# Altium PCB SFCmasterL.PcbDoc
Units mm, origin at the board's own origin, x right, y up, seen from the top; angles counter-clockwise.
Board outline 152.4 x 101.6 mm, 2 copper layers (Top Layer, Bottom Layer); 29 components, 16 nets, 98 pads, 31 vias.
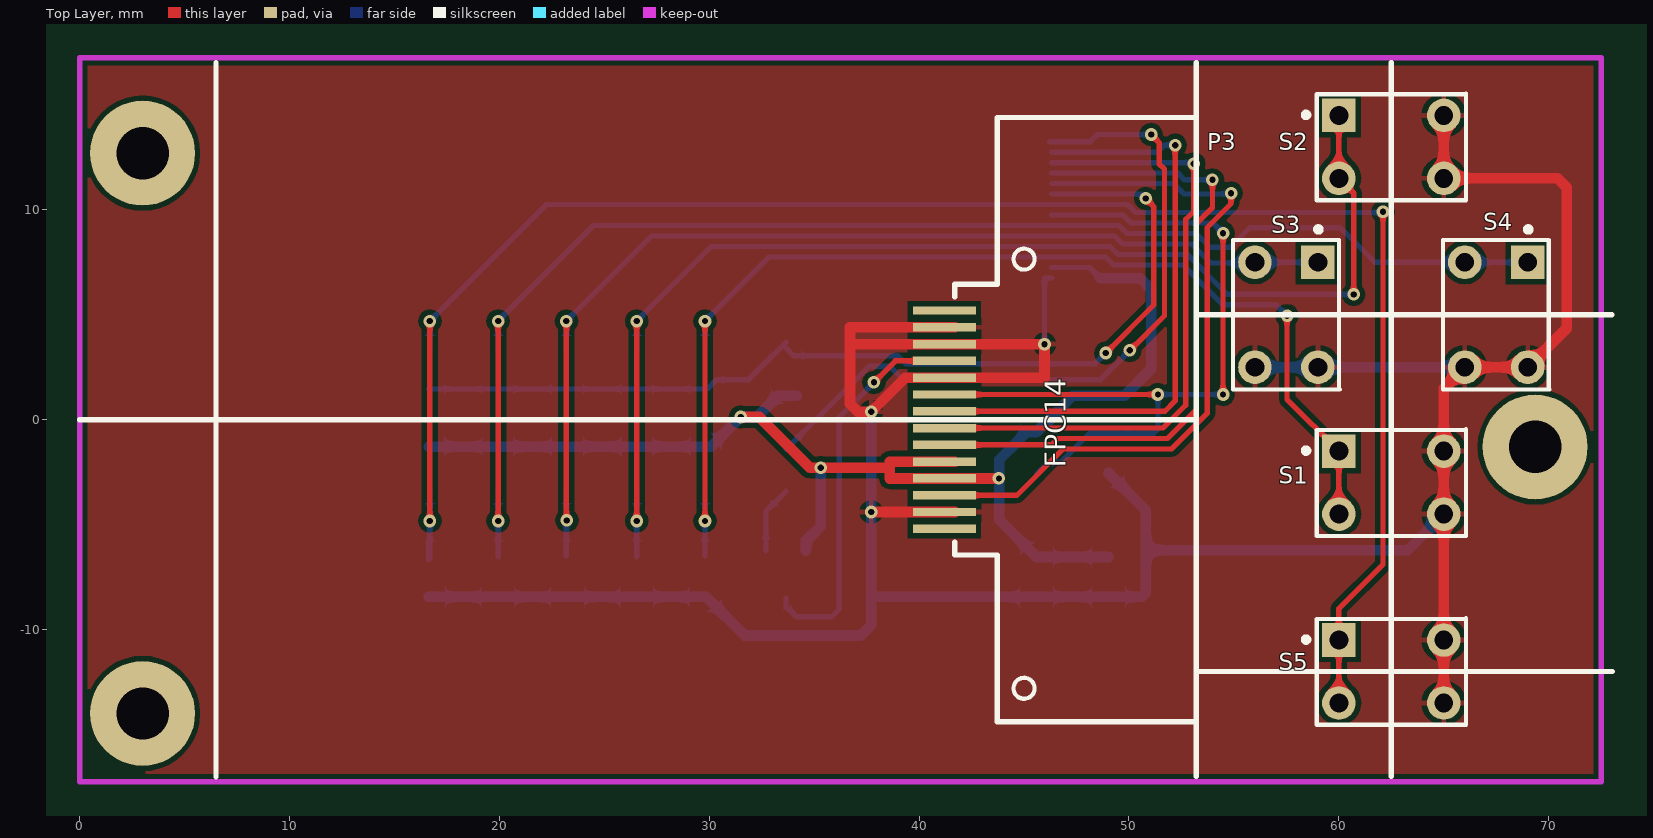
[diagram p0: Top Layer view]
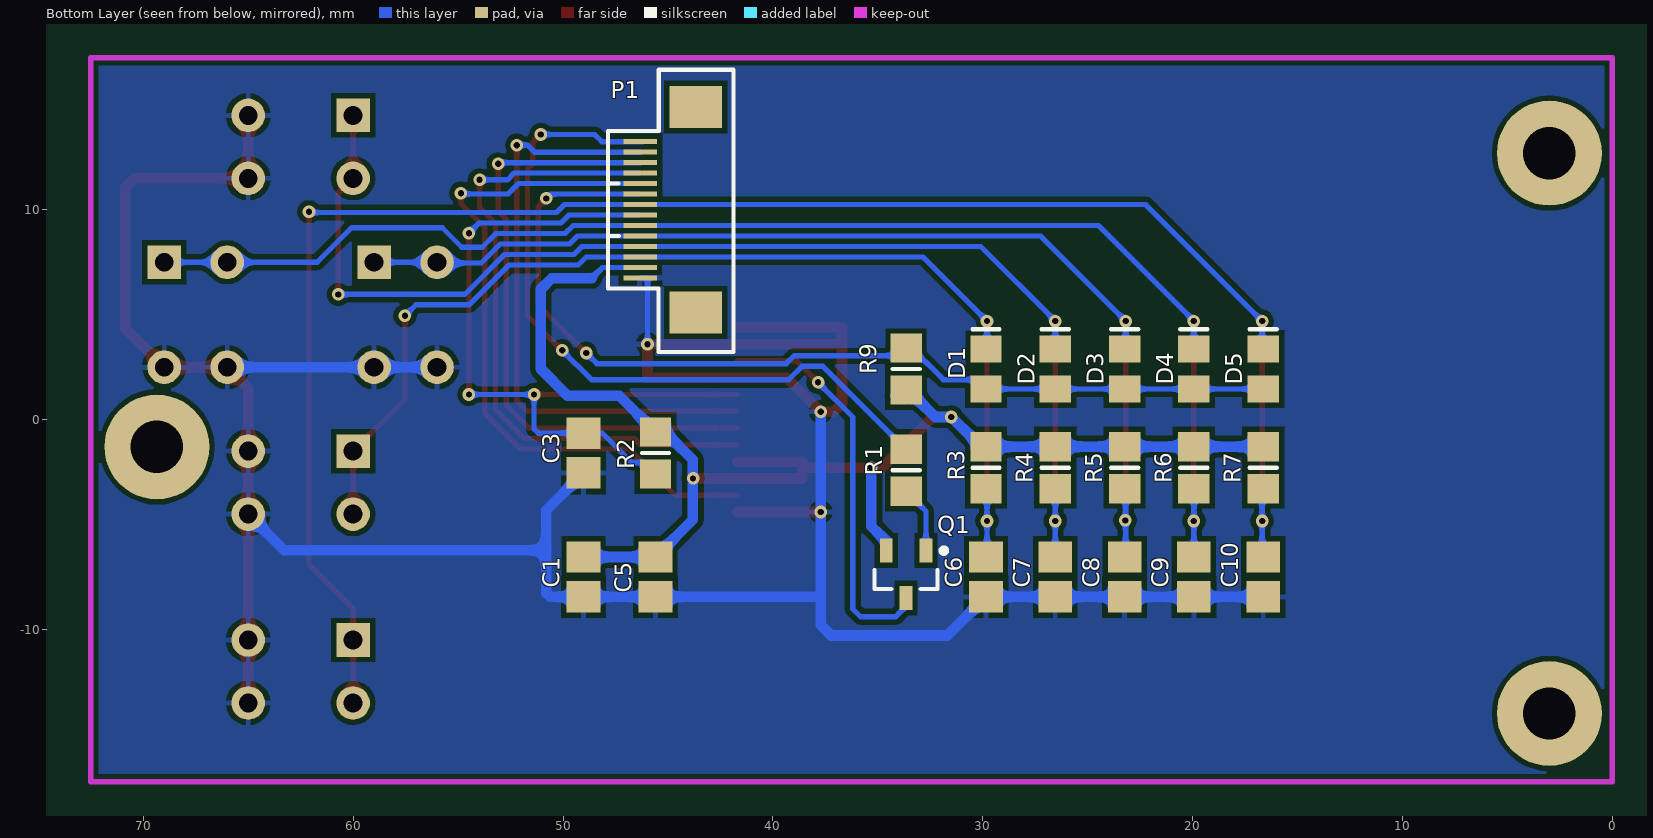
[diagram p1: Bottom Layer view, seen from below]

## Layer stack, top to bottom
Top Solder: solder mask 0.0102, Solder Resist, Dk 3.5
Top Layer: signal copper 0.0356
Dielectric 1: dielectric 0.32, FR-4, Dk 4.8
Bottom Layer: signal copper 0.0356
Bottom Solder: solder mask 0.0102, Solder Resist, Dk 3.5

## Board outline
-8.128,-24.551 144.272,-24.551 144.272,77.049 -8.128,77.049

## Design rules (kind name [scope] priority, off if disabled: settings)
Clearance [All] p1: gap=0.246
ComponentClearance [All] p1: gap=0 collisioncheckmode=3 verticalgap=2540 showdistances=FALSE
PolygonConnect [All] p1: connectstyle=Relief reliefconductorwidth=0.254 reliefentries=4 polygonreliefangle="90 Angle" airgapwidth=0.254
RoutingVias [All] p1: holewidth=0.3 width=0.6 viastyle="Through Hole" minholewidth=0.3 minwidth=0.6 maxholewidth=0.5 maxwidth=1.27
SilkToSilkClearance [All] p1 off: silktosilkclearance=0
SilkToSolderMaskClearance [IsPad] p1 off: minsilkscreentomaskgap=0.254 clearancetoexposedcopper=TRUE
SolderMaskExpansion [All] p1: expansion=0.102
Width Width_PWR [InNet('3.3V') or InNet('GND')] p1: maxlimit=0.508 minlimit=0.254 preferedwidth=0.508
Width [All] p2: maxlimit=0.254 minlimit=0.254 preferedwidth=0.254
27 further rules are at their usual default settings.

## Components (designator, comment, footprint, x,y, rotation, side; value= is the part's Value field where it differs from the comment)
C1 "0.1uF" CAPC2012M 49.022,-7.493 r90 bottom
C3 "0.1uF" CAPC2012M 49.022,-1.59 r270 bottom
C5 "10uF" CAPC2012M 45.593,-7.493 r90 bottom
C6 "0.1uF" CAPC2012M 29.845,-7.493 r270 bottom
C7 "0.1uF" CAPC2012M 26.543,-7.493 r270 bottom
C8 "0.1uF" CAPC2012M 23.241,-7.493 r270 bottom
C9 "0.1uF" CAPC2012M 19.939,-7.493 r270 bottom
C10 "0.1uF" CAPC2012M 16.637,-7.493 r270 bottom
D1 "LL4148" CD2012-0805 29.845,2.413 r90 bottom
D2 "LL4148" CD2012-0805 26.543,2.413 r90 bottom
D3 "LL4148" CD2012-0805 23.241,2.413 r90 bottom
D4 "LL4148" CD2012-0805 19.939,2.413 r90 bottom
D5 "LL4148" CD2012-0805 16.637,2.413 r90 bottom
P1 "Header 14" FPC0.5-14P-A 45,10 r270 bottom locked
P3 "Header 14" FPC14 41.7,0 r270 top locked
Q1 "SS8550" SOT-23_N 33.655,-7.366 r270 bottom
R1 "1K" RESC2012M 33.655,-2.413 r90 bottom
R2 "10K" RESC2012M 45.593,-1.59 r270 bottom
R3 "100K" RESC2012M 29.845,-2.286 r90 bottom
R4 "100K" RESC2012M 26.543,-2.286 r90 bottom
R5 "100K" RESC2012M 23.241,-2.286 r90 bottom
R6 "100K" RESC2012M 19.939,-2.286 r90 bottom
R7 "100K" RESC2012M 16.637,-2.286 r90 bottom
R9 "100K" RESC2012M 33.655,2.413 r270 bottom
S1 "SW-PBD" PBDIP-4.5x4.5 62.5,-3 r0 top locked
S2 "SW-PBD" PBDIP-4.5x4.5 62.5,13 r0 top locked
S3 "SW-PBD" PBDIP-4.5x4.5 57.5,5 r270 top locked
S4 "SW-PBD" PBDIP-4.5x4.5 67.5,5 r270 top locked
S5 "SW-PBD" PBDIP-4.5x4.5 62.5,-12 r0 top locked

## Footprints (in the part's own frame and the unit in brackets; to place one, negate y for a bottom-side part, rotate by r counter-clockwise, add the part's x,y. Pads: shape width x height; smd on the part's side, far side on the other; paste and mask are expansions set on the pad)
CAPC2012M [mm] "Chip Capacitor, Body 2.0x1.3mm, IPC Low Density"
  rect 1.5x1.6 smd: 1(-0.95,0) 2(0.95,0)
  body extent -1.1,-0.72 1.1,0.72, height 1.1
CD2012-0805 [mm] "Chip Diode; Body 2.0 x 1.3 mm (LxW typ)"
  rect 1.3x1.5 smd: 1(-0.95,0) 2(0.95,0)
  silkscreen extent 1.9,-0.65 1.9,0.65
FPC0.5-14P-A [mm]
  rect 0.25x1.6 smd: 1(-3.25,-1.325) 2(-2.75,-1.325) 3(-2.25,-1.325) 4(-1.75,-1.325) 5(-1.25,-1.325) 6(-0.75,-1.325) 7(-0.25,-1.325) 8(0.25,-1.325) 9(0.75,-1.325) 10(1.25,-1.325) 11(1.75,-1.325) 12(2.25,-1.325) 13(2.75,-1.325) 14(3.25,-1.325)
  rect 2x2.5 smd: A(-4.9,1.325) B(4.9,1.325)
  silkscreen extent -6.68,-2.86 6.78,3.12
FPC14 [mm]
  rect 0.4x3 smd: 1(-5.2,-0.5) 2(-4.4,-0.5) 3(-3.6,-0.5) 4(-2.8,-0.5) 5(-2,-0.5) 6(-1.2,-0.5) 7(-0.4,-0.5) 8(0.4,-0.5) 9(1.2,-0.5) 10(2,-0.5) 11(2.8,-0.5) 12(3.6,-0.5) 13(4.4,-0.5) 14(5.2,-0.5)
  silkscreen extent -14.4,0 14.4,11.5
PBDIP-4.5x4.5 [mm] "Double-Pole, Single-Throw Switch; 4 Leads;Pitch 3mmx5mm,Body 4.5mmx4.5mm"
  rect 1.6x1.6 hole 0.9: 1(-2.5,1.5)
  round 1.6 hole 0.9: 2(-2.5,-1.5) 3(2.5,-1.5) 4(2.5,1.5)
  silkscreen extent -4.19,-2.54 3.56,2.54
RESC2012M [mm] "Chip Resistor, Body 2.0x1.3mm, IPC Low Density"
  rect 1.4x1.5 smd: 1(-1,0) 2(1,0)
  silkscreen extent 0,-0.65 0,0.65, body extent -1.07,-0.7 1.07,0.7, height 0.65
SOT-23_N [mm] "SOT23, 3-Leads, Body 2.9x1.3mm, Pitch 0.95mm, Lead Span 2.5mm, IPC Medium Density"
  rect 1.15x0.6 smd: 1(-1.125,0.95) 2(-1.125,-0.95) 3(1.125,0)
  silkscreen extent -1.25,-1.5 0.7,1.92, body extent -0.7,-1.5 0.7,1.5, height 1.1

## Part data
C1 C3 C5 C6 C7 C8 C9 C10: library part Cap, "Capacitor"
D1 D2 D3 D4 D5: library part "Diode 1N4007", "1 Amp General Purpose Rectifier"
P1 P3: "Header, 14-Pin"
Q1: library part 2N3906, "PNP General Purpose Amplifier"
R1 R2 R3 R4 R5 R6 R7 R9: library part Res1, "Resistor"
S1 S2 S3 S4 S5: "Switch"

## Free pads (board coordinates)
  round 5 hole 2.5: 0(3,-14) 0(3,12.7) 0(69.35,-1.3)

## Via types
v1: diameter 0.6, hole 0.3, Top Layer to Bottom Layer, 31 vias

## Nets (pads, with @x,y where several pads share a name; then routed paths per layer and width w, separated by ;. In a path a pad name is that pad's centre, name@x,y a point inside that pad or via, vN(x,y) a via of type N, cw(c..) or ccw(c..) an arc to the next point about the centre after c; other vN are vias at no path point)
3.3V: C1.2 C5.2 P1.13 P3.10 P3.11 Q1.2 R2.1 R3.2 R4.2 R5.2 R6.2 R7.2 R9.2 | length 66.8
  Top Layer w0.508: v1(31.496,0.127) 32.385,0.127 34.798,-2.286 38.608,-2.286 ; P3.10@41.7,-2 38.608,-2 38.608,-2.8 v1(43.802,-2.8)
  Bottom Layer w0.254: P1.13 48.122,7.25 48.631,6.741
  Bottom Layer w0.508: R7.2 30.083,-1.286 v1(31.496,0.127) 32.258,0.127 33.274,1.143 R9.2@34.163,1.143 ; Q1.2 34.605,-5.781 35.306,-5.08 v1(35.306,-2.286) ; 48.631,6.741 50.536,6.741 51.052,6.225 51.052,2.411 49.784,1.143 47.326,1.143 R2.1 45.13,-0.59 43.815,-1.905 43.815,-4.765 C5.2 C1.2
GND: C1.1 C3.2 C5.1 C6.2 C7.2 C8.2 C9.2 C10.2 P1.14 P3.2 P3.3 P3.5 P3.13 S1.3 S1.4 S2.3 S2.4 S3.3 S3.4 S4.3 S4.4 S5.3 S5.4 | length 152.2
  Top Layer w0.508: 36.703,3.6 36.747,3.556 36.791,3.6 v1(45.974,3.6) ; v1(37.719,-4.4) P3.13@41.7,-4.4 ; P3.2@41.7,4.4 36.703,4.4 36.703,0.762 37.084,0.381 v1(37.719,0.381) 39.338,2 45.974,2 v1(45.974,3.6) ; 45.487,3.6 v1(45.974,3.6) ; S5.3 65,1.5 S4.3 S4.4 70.866,4.366 70.866,11.049 70.415,11.5 S2.3 S2.4
  Bottom Layer w0.254: v1(45.974,3.6) 45.974,6.75 P1.14
  Bottom Layer w0.508: C10.2 C9.2 C8.2 C7.2 C6.2 31.689,-10.287 37.211,-10.287 37.719,-9.779 v1(37.719,-4.4) v1(37.719,0.381) ; 37.724,-8.382 37.785,-8.443 C5.1 C1.1 50.612,-8.443 50.8,-8.255 50.8,-6.223 ; C3.2 50.8,-4.318 50.8,-6.223 ; S3.3 S3.4 S4.3 ; S1.3 63.277,-6.223 50.8,-6.223
KEY_DOWN: C7.1 D2.2 P1.11 R4.1 S2.1 S2.2 | length 60.1
  Top Layer w0.254: v1(26.543,-4.826) v1@26.543,4.826 ; S2.1 S2.2@60,11.613 ; S2.2@60.325,11.938 S2.2@60,11.613 ; v1(60.706,5.969) 60.706,10.794 S2.2 S2.2@60,11.613
  Bottom Layer w0.254: C7.1 R4.1 ; D2.2 v1(26.543,4.699) 30.094,8.25 49.099,8.25 49.481,7.868 52.783,7.868 54.682,5.969 v1(60.706,5.969)
KEY_ENTER: C10.1 D5.2 P1.7 R7.1 S5.1 S5.2 | length 87.1
  Top Layer w0.254: v1(16.687,-4.826) v1(16.687,4.699) ; S5.2 60,-9 62.103,-6.897 v1(62.103,9.906)
  Bottom Layer w0.254: C10.1@16.637,-6.67 C10.1 C10.1@16.637,-5.856 ; C10.1@16.687,-6.62 v1(16.687,-4.826) R7.1@16.687,-3.336 ; D5.2@16.687,3.413 v1(16.687,4.699) 22.238,10.25 49.928,10.25 50.31,9.868 62.065,9.868 v1(62.103,9.906)
KEY_INT: D1.1 D2.1 D3.1 D4.1 D5.1 P1.6 R9.1 | length 46.7
  Top Layer w0.254: v1(48.895,3.175) 51.181,5.461 51.181,10.16 v1(50.8,10.541)
  Bottom Layer w0.254: D5.1 29.911,1.463 30.353,1.905 31.877,1.905 R9.1@33.655,3.683 ; R9.1 34.02,3.048 38.989,3.048 39.37,2.667 48.387,2.667 v1(48.895,3.175) ; P1.6 50.591,10.75 v1(50.8,10.541)
KEY_LEFT: C8.1 D3.2 P1.10 R5.1 S3.1 S3.2 | length 52
  Top Layer w0.254: v1(23.191,4.699) 23.191,-4.776 v1(23.216,-4.801)
  Bottom Layer w0.254: C8.1@23.191,-6.493 R5.1@23.191,-3.286 ; D3.2@23.191,3.413 v1(23.191,4.699) 27.242,8.75 49.306,8.75 49.688,8.368 52.99,8.368 53.895,7.463 55.963,7.463 S3.2 S3.1
KEY_RIGHT: C9.1 D4.2 P1.9 R6.1 S4.1 S4.2 | length 66.6
  Top Layer w0.254: v1(19.939,-4.826) v1(19.939,4.699)
  Bottom Layer w0.254: C9.1 R6.1 ; D4.2 v1(19.939,4.699) 24.49,9.25 49.513,9.25 49.895,8.868 53.197,8.868 53.848,8.217 54.826,8.217 55.753,9.144 60.071,9.144 61.715,7.5 S4.1
KEY_UP: C6.1 D1.2 P1.12 R3.1 S1.1 S1.2 | length 54.7
  Top Layer w0.254: v1@29.795,-4.903 v1(29.795,-4.826) v1(29.795,4.699) ; v1(57.531,4.953) 57.531,0.969 S1.1 S1.2
  Bottom Layer w0.254: C6.1@29.795,-6.493 R3.1@29.795,-3.286 ; D1.2@29.795,3.413 v1(29.795,4.699) 32.846,7.75 48.892,7.75 49.274,7.368 52.576,7.368 54.475,5.469 57.015,5.469 v1(57.531,4.953)
LCD_RESET: C3.1 P1.8 P3.6 R2.2 | length 37.3
  Top Layer w0.254: P3.6@41.7,1.2 v1(51.378,1.2) ; v1(54.483,1.2) v1(54.483,8.89)
  Bottom Layer w0.254: R2.2 46.151,-2.032 46.736,-2.032 48.128,-0.64 51.176,-0.64 51.378,-0.438 v1(51.378,1.2) v1(54.483,1.2) ; P1.8 49.72,9.75 50.102,9.368 54.005,9.368 v1(54.483,8.89)
NetP3_4: P3.4 Q1.3 | length 19
  Top Layer w0.254: v1(37.846,1.778) 38.868,2.8 P3.4@41.7,2.8
  Bottom Layer w0.254: Q1.3@33.655,-8.509 33.655,-8.89 34.163,-9.398 35.814,-9.398 36.195,-9.017 36.195,0.127 v1(37.846,1.778)
NetQ1_1: Q1.1 R1.1 | length 3.2
  Bottom Layer w0.254: Q1.1 32.705,-4.363 R1.1
SPI1_LCD_A0: P1.2 P3.7 | length 28.9
  Top Layer w0.254: P3.7@41.7,0.4 51.708,0.4 52.197,0.889 v1(52.197,13.081)
  Bottom Layer w0.254: P1.2 51.358,12.75 51.689,13.081 v1(52.197,13.081)
SPI1_LCD_BL: P1.1 R1.2 | length 35.1
  Top Layer w0.254: v1(50.038,3.302) 51.689,4.953 51.689,11.938 51.435,12.192 51.435,13.208 v1(51.054,13.589)
  Bottom Layer w0.254: R1.2 37.608,2.54 38.608,2.54 39.243,1.905 48.641,1.905 v1(50.038,3.302) ; P1.1@46.228,13.25 48.154,13.25 48.493,13.589 v1(51.054,13.589)
SPI1_LCD_MOSI: P1.3 P3.8 | length 29.8
  Top Layer w0.254: P3.8@41.7,-0.4 41.703,-0.397 51.618,-0.397 52.705,0.69 52.705,9.542 53.086,9.923 v1(53.086,12.192)
  Bottom Layer w0.254: P1.3 v1@53.028,12.25
SPI1_LCD_NSS: P1.5 P3.12 | length 33.4
  Top Layer w0.254: P3.12@41.7,-3.6 44.66,-3.6 46.863,-1.397 52.032,-1.397 53.721,0.292 53.721,9.144 54.864,10.287 v1(54.864,10.795)
  Bottom Layer w0.254: P1.5 52.123,11.25 52.616,10.757 54.826,10.757 v1(54.864,10.795)
SPI1_LCD_SCK: P1.4 P3.9 | length 31.3
  Top Layer w0.254: P3.9@41.7,-1.2 46.298,-1.2 46.601,-0.897 51.825,-0.897 53.213,0.491 53.213,9.343 53.975,10.105 v1(53.975,11.43)
  Bottom Layer w0.254: P1.4 52.33,11.75 52.65,11.43 v1(53.975,11.43)
pads on no net: P1.A P1.B P3.1 P3.14

## Polygon pours and split planes (outlines as drawn)
GND on Top Layer "Top Layer-No Net" (solid, remove dead copper, pour order 2): -0.173,16.979 72.827,16.979 72.827,-17.021 -0.173,-17.021
GND on Bottom Layer "Top Layer-No Net" (solid, remove dead copper, pour order 4): -0.249,16.962 72.751,16.962 72.751,-17.038 -0.249,-17.038

## Keep-outs
Keep-Out Layer:
  lines w0.254: 0,-17.25 72.5,-17.25 ; 0,-17.24 0,17.24 ; 0,17.25 72.5,17.25 ; 72.5,-17.24 72.5,17.24

## Silkscreen, mask and mechanical layers (free items; w line width, h text height)
Top Overlay:
  lines w0.254: 0,0 53.2,0 ; 6.5,-17.012 6.5,17 ; 53.2,-17 53.2,17 ; 53.2,-12 73.031,-12 ; 53.2,5 73,5 ; 62.5,-17 62.5,17

## Dimensions
0,-17.25 to 0,17.25 on Mechanical 15
0,-17.24 to 72.5,-17.24 on Mechanical 15

## Text inside footprints (layer, text, board x,y; h text height)
P3: Top Overlay "FPC14" at 46.99,-2.286 h1 r90